# Altium PCB PCB.PcbDoc (part 1 of 2)
Units mm, origin at the board's own origin, x right, y up, seen from the top; angles counter-clockwise.
Board outline 181 x 108 mm, 2 copper layers (Top Layer, Bottom Layer), stack 1.571 mm thick; 37 components, 127 nets, 780 pads, 76 vias.
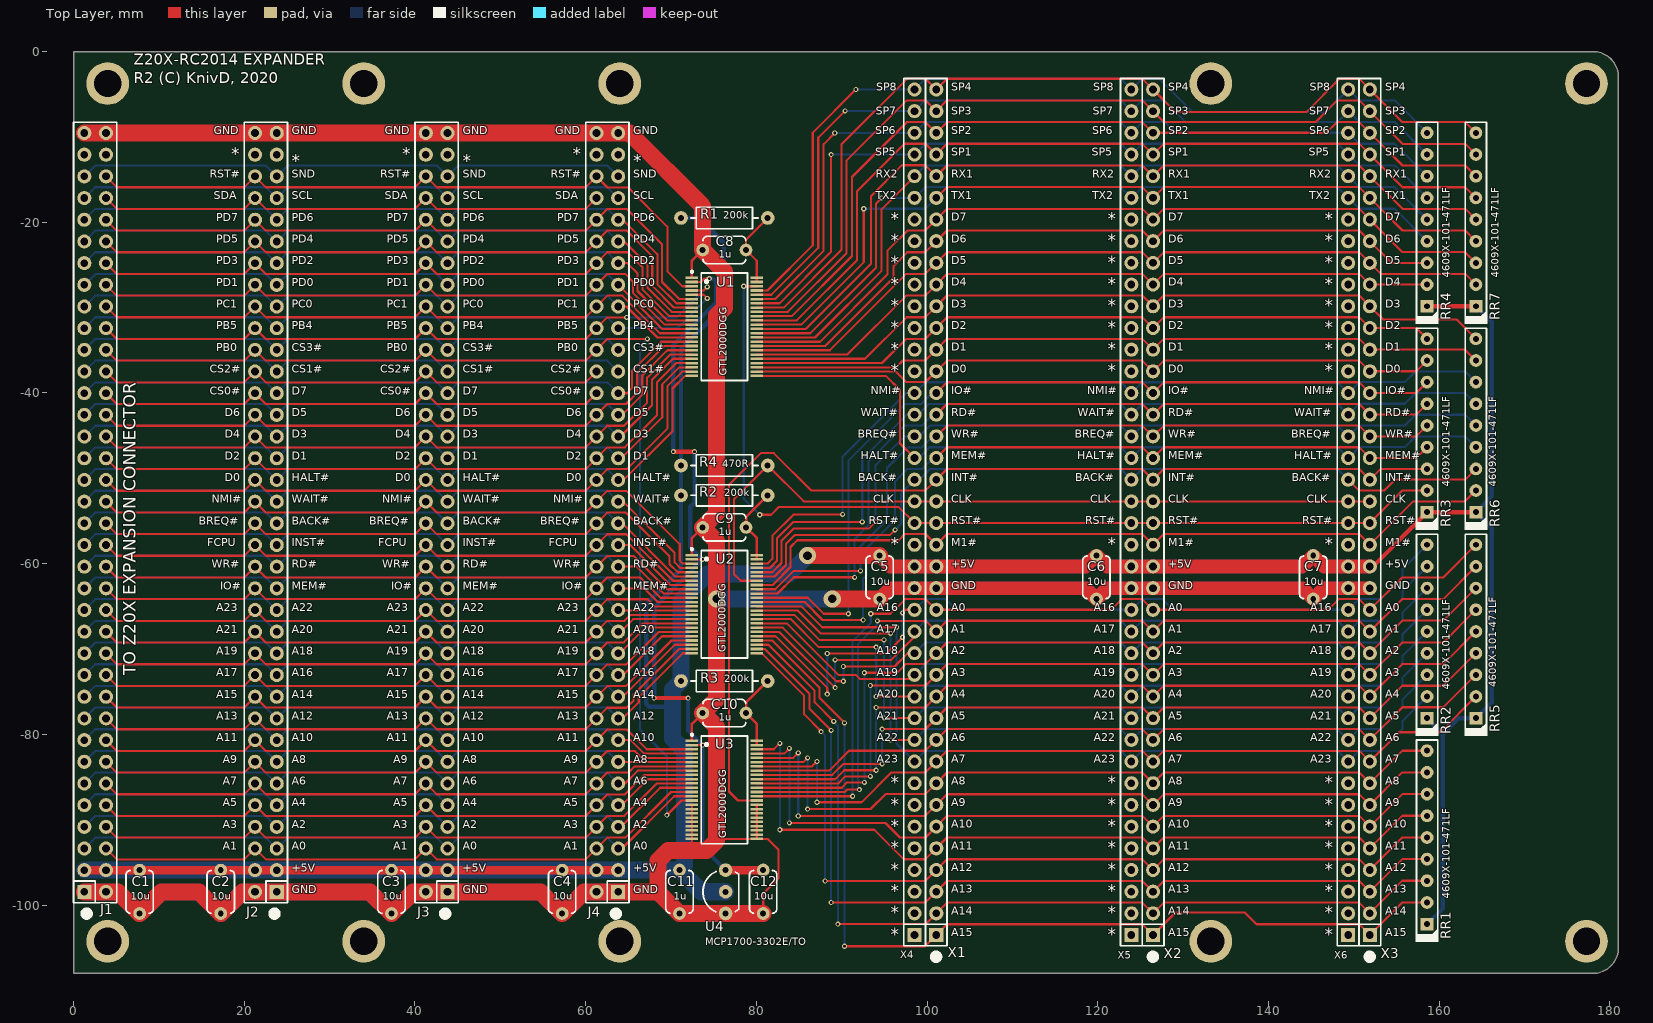
[diagram p0: Top Layer view]
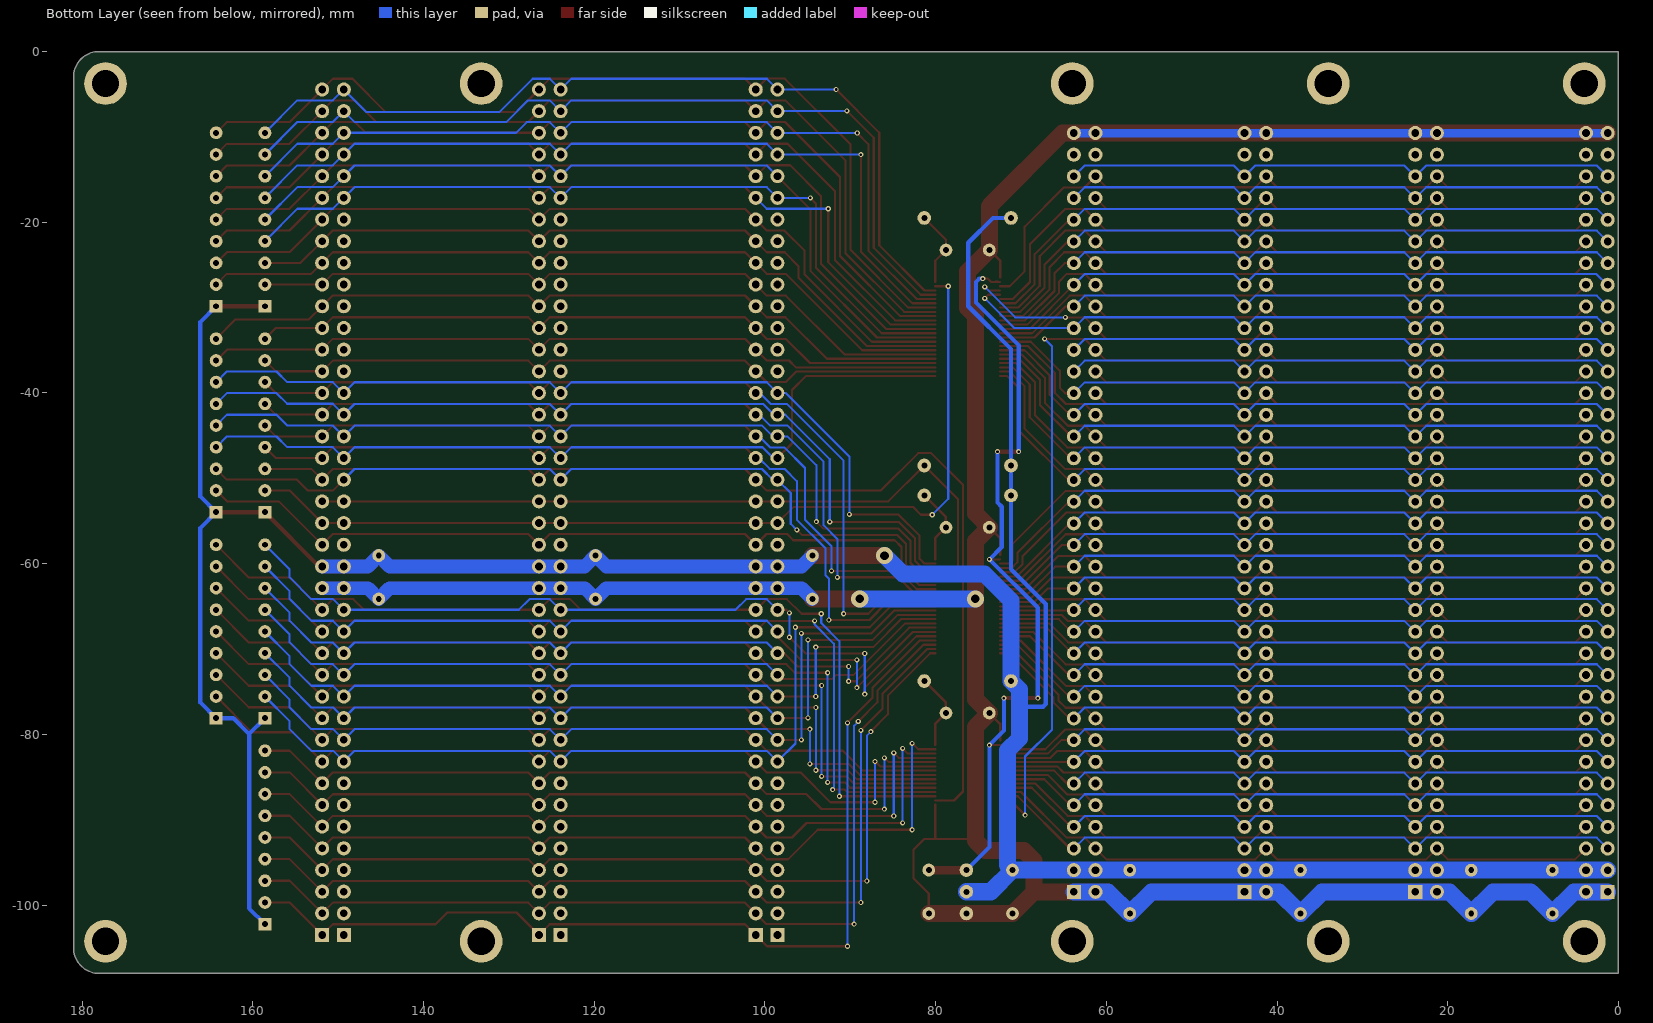
[diagram p1: Bottom Layer view, seen from below]

## Layer stack, top to bottom
Top Solder: solder mask 0.0102, Solder Resist, Dk 3.5
Top Layer: signal copper 0.0356
Dielectric 1: core 1.5, FR-4, Dk 4.2
Bottom Layer: signal copper 0.0356
Solder Side: solder mask 0.0102, Solder Resist, Dk 3.5

## Board outline
0,-108 178,-108 ccw(c178,-105) 181,-105 181,-3 ccw(c178,-3) 178,0 0,0

## Design rules (kind name [scope] priority, off if disabled: settings)
Clearance Clearance_U1 [(InComponent('U1') OR InComponent('U2') OR InComponent('U3'))] p1: gap=0.2 ignorepadtopadclearanceinfootprint=TRUE
Clearance Clearance_Poly [(IsRegion)] p2: gap=0.5 ignorepadtopadclearanceinfootprint=TRUE
Clearance [All] p3: gap=0.25 ignorepadtopadclearanceinfootprint=TRUE
DiffPairsRouting [All] p1: maxlimit=1 minlimit=0.15 mostfreqgap=0.2 toplayer_minwidth=0.2 toplayer_maxwidth=1 toplayer_prefwidth=0.2 bottomlayer_minwidth=0.2 bottomlayer_maxwidth=1 bottomlayer_prefwidth=0.2 maxuncoupledlength=12.7
HoleSize [All] p1 off: absolutevalues=TRUE maxlimit=2.5 minlimit=0.025 maxpercent=80.000 minpercent=20.000
HoleToHoleClearance [All] p1 off: gap=0 allowstackedmicrovias=TRUE
LayerPairs [All] p1 off: enforce=TRUE
MaxMinImpedance [InNet('ANT50R')] p1: minimum=49.90 maximum=50.10
MinimumSolderMaskSliver [All] p1 off: minsoldermaskwidth=-50
NetAntennae [All] p1 off: netantennaetolerance=0
PlaneClearance [All] p1: clearance=0.5
PlaneConnect [All] p1: planeconnectstyle=Direct reliefexpansion=0.5 reliefentries=4 reliefconductorwidth=0.35 reliefairgap=0.35
PolygonConnect [All] p1: thpad.connectstyle=Relief thpad.reliefconductorwidth=0.25 thpad.reliefentries=4 thpad.polygonreliefangle="90 Angle" thpad.airgapwidth=0.35 smdpad.connectstyle=Relief smdpad.reliefconductorwidth=0.25 smdpad.reliefentries=4 smdpad.polygonreliefangle="90 Angle" smdpad.airgapwidth=0.35 via.connectstyle=Direct via.reliefconductorwidth=0.35 via.reliefentries=4 via.polygonreliefangle="90 Angle" via.airgapwidth=0.35
RoutingCorners [All] p1: cornerstyle=45-Degree minsetback=2 maxsetback=2
RoutingVias [All] p1: holewidth=0.3 width=0.6 viastyle="Through Hole" minholewidth=0.3 minwidth=0.6 maxholewidth=1 maxwidth=2
SilkToBoardRegionClearance [All] p1 off:
SilkToSilkClearance [All] p1 off: silktosilkclearance=-50
SilkToSolderMaskClearance [IsPad] p1 off: minsilkscreentomaskgap=-50 clearancetoexposedcopper=TRUE
SolderMaskExpansion [All] p1: expansion=0.102
Width [All] p1: maxlimit=5 minlimit=0.2 preferedwidth=0.25
18 further rules are at their usual default settings.

## Components (designator, comment, footprint, x,y, rotation, side; value= is the part's Value field where it differs from the comment)
C1 "10u" CAPRR508-350X500X500 7.75,-98.45 r270 top locked
C2 "10u" CAPRR508-350X500X500 17.25,-98.45 r270 top locked
C3 "10u" CAPRR508-350X500X500 37.25,-98.45 r270 top locked
C4 "10u" CAPRR508-350X500X500 57.25,-98.45 r270 top locked
C5 "10u" CAPRR508-350X500X500 94.44,-61.595 r90 top locked
C6 "10u" CAPRR508-350X500X500 119.84,-61.595 r90 top locked
C7 "10u" CAPRR508-350X500X500 145.24,-61.595 r90 top locked
C8 "1u" CAPRR508-350X500X500 76.25,-23.25 r180 top locked
C9 "1u" CAPRR508-350X500X500 76.25,-55.75 r180 top locked
C10 "1u" CAPRR508-350X500X500 76.25,-77.5 r180 top locked
C11 "1u" CAPRR508-350X500X500 71,-98.44 r270 top locked
C12 "10u" CAPRR508-350X500X500 80.8,-98.44 r270 top locked
J1 "" 2011-2X36S-F#1 2.54,-54 r90 top locked
J2 "" 2011-2X36S-F#2 22.54,-54 r90 top locked
J3 "" 2011-2X36S-F#2 42.54,-54 r90 top locked
J4 "" 2011-2X36S-F#2 62.54,-54 r90 top locked
R1 "200k" RES1016-660X250 76.25,-19.5 r0 top locked
R2 "200k" RES1016-660X250 76.25,-52 r0 top locked
R3 "200k" RES1016-660X250 76.25,-73.75 r0 top locked
R4 "470R" RES1016-660X250 76.25,-48.5 r180 top locked
RR1 "4609X-101-471LF" RN_BOURNS_4600X 158.575,-92.075 r90 top locked
RR2 "4609X-101-471LF" RN_BOURNS_4600X 158.575,-67.945 r90 top locked
RR3 "4609X-101-471LF" RN_BOURNS_4600X 158.575,-43.815 r90 top locked
RR4 "4609X-101-471LF" RN_BOURNS_4600X 158.575,-19.685 r90 top locked
RR5 "4609X-101-471LF" RN_BOURNS_4600X 164.29,-67.945 r90 top locked
RR6 "4609X-101-471LF" RN_BOURNS_4600X 164.29,-43.815 r90 top locked
RR7 "4609X-101-471LF" RN_BOURNS_4600X 164.29,-19.685 r90 top locked
U1 "GTL2000DGG" SOP50P810X120-48N 76.25,-32.25 r0 top locked
U2 "GTL2000DGG" SOP50P810X120-48N 76.25,-64.75 r0 top locked
U3 "GTL2000DGG" SOP50P810X120-48N 76.25,-86.5 r0 top locked
U4 "MCP1700-3302E/TO" TO-92AA-P254 76.4,-98.44 r90 top locked
X1 "SIL40-F" 2011-1X40S 101.075,-53.975 r90 top locked
X2 "SIL40-F" 2011-1X40S 126.475,-53.975 r90 top locked
X3 "SIL40-F" 2011-1X40S 151.875,-53.975 r90 top locked
X4 "SIL40-F" 2011-1X40S 98.535,-53.975 r90 top locked
X5 "SIL40-F" 2011-1X40S 123.935,-53.975 r90 top locked
X6 "SIL40-F" 2011-1X40S 149.335,-53.975 r90 top locked

## Footprints (in the part's own frame and the unit in brackets; to place one, negate y for a bottom-side part, rotate by r counter-clockwise, add the part's x,y. Pads: shape width x height; smd on the part's side, far side on the other; paste and mask are expansions set on the pad)
2011-1X40S [mil] "2011-1X40 Straight Pin Header"
  rect 65x65 hole 35.43: 1(-1950,0)
  round 65 hole 35.43: 2(-1850,0) 3(-1750,0) 4(-1650,0) 5(-1550,0) 6(-1450,0) 7(-1350,0) 8(-1250,0) 9(-1150,0) 10(-1050,0) 11(-950,0) 12(-850,0) 13(-750,0) 14(-650,0) 15(-550,0) 16(-450,0) 17(-350,0) 18(-250,0) 19(-150,0) 20(-50,0) 21(50,0) 22(150,0) 23(250,0) 24(350,0) 25(450,0) 26(550,0) 27(650,0) 28(750,0) 29(850,0) 30(950,0) 31(1050,0) 32(1150,0) 33(1250,0) 34(1350,0) 35(1450,0) 36(1550,0) 37(1650,0) 38(1750,0) 39(1850,0) 40(1950,0)
  silkscreen extent -2000,-50 2000,50
2011-2X36S-F#1 [mil] "2011-2X36 Straight Pin Header"
  rect 65x65 hole 35.43: 1(-1750,50)
  round 65 hole 35.43: 2(-1750,-50) 3(-1650,50) 4(-1650,-50) 5(-1550,50) 6(-1550,-50) 7(-1450,50) 8(-1450,-50) 9(-1350,50) 10(-1350,-50) 11(-1250,50) 12(-1250,-50) 13(-1150,50) 14(-1150,-50) 15(-1050,50) 16(-1050,-50) 17(-950,50) 18(-950,-50) 19(-850,50) 20(-850,-50) 21(-750,50) 22(-750,-50) 23(-650,50) 24(-650,-50) 25(-550,50) 26(-550,-50) 27(-450,50) 28(-450,-50) 29(-350,50) 30(-350,-50) 31(-250,50) 32(-250,-50) 33(-150,50) 34(-150,-50) 35(-50,50) 36(-50,-50) 37(50,50) 38(50,-50) 39(150,50) 40(150,-50) 41(250,50) 42(250,-50) 43(350,50) 44(350,-50) 45(450,50) 46(450,-50) 47(550,50) 48(550,-50) 49(650,50) 50(650,-50) 51(750,50) 52(750,-50) 53(850,50) 54(850,-50) 55(950,50) 56(950,-50) 57(1050,50) 58(1050,-50) 59(1150,50) 60(1150,-50) 61(1250,50) 62(1250,-50) 63(1350,50) 64(1350,-50) 65(1450,50) 66(1450,-50) 67(1550,50) 68(1550,-50) 69(1650,50) 70(1650,-50) 71(1750,50) 72(1750,-50)
  silkscreen extent -1800,-100 1800,100, body extent -1810,-98 1810,98, height 118
2011-2X36S-F#2 [mil] "2011-2X36 Straight Pin Header"
  rect 65x65 hole 35.43: 1(-1750,-50)
  round 65 hole 35.43: 2(-1750,50) 3(-1650,-50) 4(-1650,50) 5(-1550,-50) 6(-1550,50) 7(-1450,-50) 8(-1450,50) 9(-1350,-50) 10(-1350,50) 11(-1250,-50) 12(-1250,50) 13(-1150,-50) 14(-1150,50) 15(-1050,-50) 16(-1050,50) 17(-950,-50) 18(-950,50) 19(-850,-50) 20(-850,50) 21(-750,-50) 22(-750,50) 23(-650,-50) 24(-650,50) 25(-550,-50) 26(-550,50) 27(-450,-50) 28(-450,50) 29(-350,-50) 30(-350,50) 31(-250,-50) 32(-250,50) 33(-150,-50) 34(-150,50) 35(-50,-50) 36(-50,50) 37(50,-50) 38(50,50) 39(150,-50) 40(150,50) 41(250,-50) 42(250,50) 43(350,-50) 44(350,50) 45(450,-50) 46(450,50) 47(550,-50) 48(550,50) 49(650,-50) 50(650,50) 51(750,-50) 52(750,50) 53(850,-50) 54(850,50) 55(950,-50) 56(950,50) 57(1050,-50) 58(1050,50) 59(1150,-50) 60(1150,50) 61(1250,-50) 62(1250,50) 63(1350,-50) 64(1350,50) 65(1450,-50) 66(1450,50) 67(1550,-50) 68(1550,50) 69(1650,-50) 70(1650,50) 71(1750,-50) 72(1750,50)
  silkscreen extent -1800,-100 1800,100, body extent -1810,-98 1810,98, height 335
CAPRR508-350X500X500 [mm] "Capacitor Radial Rounded, Pin spacing 5.08mm - Body With 3.2mm X Body Length 5.0mm X Body Height 5.0mm"
  round 1.5 hole 0.7: 1(-2.54,0) 2(2.54,0)
  silkscreen extent -2.5,-1.6 2.5,1.6, body extent -2.79,-1.75 2.79,1.75, height 5
RES1016-660X250 [mm] "Resistor, Axial, Pad spacing 10.16 mm - Body Lengh 6.6mm X Body Diameter 2.5mm"
  round 1.6 hole 0.7: 1(-5.08,0) 2(5.08,0)
  silkscreen extent -3.95,-1.25 3.95,1.25, body extent -5.38,-1.25 5.38,1.25, height 2.5
RN_BOURNS_4600X [mm] "SIP-9 Resistor Network, Body 22.81x 2.49mm, Bourns Serie 4600X"
  rect 1.5x1.5 hole 0.7: 1(-10.16,0)
  round 1.5 hole 0.7: 2(-7.62,0) 3(-5.08,0) 4(-2.54,0) 5(0,0) 6(2.54,0) 7(5.08,0) 8(7.62,0) 9(10.16,0)
  silkscreen extent -12.22,-1.35 11.41,1.35, body extent -11.4,-1.24 11.41,1.25, height 5.08
SOP50P810X120-48N [mm] "SOP, 48-Leads, Body 12.6x6.2mm (max), Pitch 0.50mm, IPC Medium Density"
  rect 1.45x0.3 smd: 1(-3.8,5.75) 2(-3.8,5.25) 3(-3.8,4.75) 4(-3.8,4.25) 5(-3.8,3.75) 6(-3.8,3.25) 7(-3.8,2.75) 8(-3.8,2.25) 9(-3.8,1.75) 10(-3.8,1.25) 11(-3.8,0.75) 12(-3.8,0.25) 13(-3.8,-0.25) 14(-3.8,-0.75) 15(-3.8,-1.25) 16(-3.8,-1.75) 17(-3.8,-2.25) 18(-3.8,-2.75) 19(-3.8,-3.25) 20(-3.8,-3.75) 21(-3.8,-4.25) 22(-3.8,-4.75) 23(-3.8,-5.25) 24(-3.8,-5.75) 25(3.8,-5.75) 26(3.8,-5.25) 27(3.8,-4.75) 28(3.8,-4.25) 29(3.8,-3.75) 30(3.8,-3.25) 31(3.8,-2.75) 32(3.8,-2.25) 33(3.8,-1.75) 34(3.8,-1.25) 35(3.8,-0.75) 36(3.8,-0.25) 37(3.8,0.25) 38(3.8,0.75) 39(3.8,1.25) 40(3.8,1.75) 41(3.8,2.25) 42(3.8,2.75) 43(3.8,3.25) 44(3.8,3.75) 45(3.8,4.25) 46(3.8,4.75) 47(3.8,5.25) 48(3.8,5.75)
  silkscreen extent -3.92,-6.3 2.7,6.57, body extent -4.06,-6.3 4.06,6.3, height 1.2
TO-92AA-P254 [mm] "TO-92 (TO226), Pitch 2.54mm, Flat Index, 3 In-Line, Bent Leads, Body Dia. 5.3mm"
  round 1.6 hole 0.7: 1(-2.54,0) 2(0,0) 3(2.54,0)
  silkscreen extent -2.36,-1.53 2.37,2.66, body extent -2.81,-1.53 2.81,2.64, height 9.33

## Part data
C1 C2 C3 C4 C5 C6 C7 C8 C9 C10 C11 C12: library part Capacitor, "Capacitor"
J1 J2 J3 J4: library part "Connector 2x36", "Dual row, 72-way connector"
R1 R2 R3 R4: library part Resistor, "Resistor"
RR1 RR2 RR3 RR4 RR5 RR6 RR7: library part "Resistor Array x8 (BUSSED)", "Resistor Array (Bussed)"
U1 U2 U3: library part GTL2000, "22-bit bi-directional low voltage translator", Manufacturer=NXP
U4: library part 78Lxx, "3-terminal 250mA positive voltage regulator", Manufacturer=Microchip
X1 X2 X3 X4 X5 X6: library part "Connector 1x40", "Single row, 40-way connector"

## Free pads (board coordinates)
  round 5 hole 3.2: 0(4,-104.25) 0(4,-3.75) 0(34,-104.25) 0(34,-3.75) 0(64,-104.25) 0(64,-3.75) 0(133.25,-104.25) 0(133.25,-3.75) 0(177.25,-104.25) 0(177.25,-3.75)

## Via types
v1: diameter 0.6, hole 0.3, Top Layer to Bottom Layer, tented both sides, 73 vias
v2: diameter 2, hole 1, Top Layer to Bottom Layer, tented both sides, 3 vias

## Nets (pads, with @x,y where several pads share a name; then routed paths per layer and width w, separated by ;. In a path a pad name is that pad's centre, name@x,y a point inside that pad or via, vN(x,y) a via of type N, cw(c..) or ccw(c..) an arc to the next point about the centre after c; other vN are vias at no path point)
*A0: RR5.9 U3.35 X1.16 X2.16 X3.16 | length 110.8
  Top Layer w0.25: U3.35@80.05,-87.25 v1(91.275,-87.25) ; v1(93.4,-65.875) 95.7,-65.875 97.425,-64.15 99.82,-64.15 X1.16@101.075,-65.405 121.57,-65.405 122.825,-64.15 125.22,-64.15 X2.16@126.475,-65.405 146.97,-65.405 148.225,-64.15 150.62,-64.15 X3.16@151.875,-65.405 155.655,-61.625 160.45,-61.625 RR5.9@164.29,-57.785
  Bottom Layer w0.25: v1(91.275,-87.25) 91.275,-69.075 93.4,-66.95 v1(93.4,-65.875)
*A1: RR5.8 U3.36 X1.15 X2.15 X3.15 | length 108.8
  Top Layer w0.25: U3.36@80.05,-86.75 90.35,-86.75 90.625,-86.475 v1(92.075,-86.475) ; v1(94.175,-66.7) 99.83,-66.7 X1.15@101.075,-67.945 102.33,-66.69 125.22,-66.69 X2.15@126.475,-67.945 127.73,-66.69 150.62,-66.69 X3.15@151.875,-67.945 155.67,-64.15 160.465,-64.15 RR5.8@164.29,-60.325
  Bottom Layer w0.25: v1(92.075,-86.475) 91.925,-86.325 91.925,-69.375 94.175,-67.125 v1(94.175,-66.7)
*A2: RR5.7 U3.37 X1.14 X2.14 X3.14 | length 103.5
  Top Layer w0.25: U3.37@80.05,-86.25 90,-86.25 90.625,-85.625 v1(92.65,-85.625) ; v1(92.65,-72.775) 96.5,-72.775 97.5,-71.775 99.785,-71.775 X1.14@101.075,-70.485 102.33,-69.23 125.22,-69.23 X2.14@126.475,-70.485 127.73,-69.23 150.62,-69.23 X3.14@151.875,-70.485 155.685,-66.675 160.48,-66.675 RR5.7@164.29,-62.865
  Bottom Layer w0.25: v1(92.65,-85.625) v1(92.65,-72.775)
*A3: RR5.6 U3.38 X1.13 X2.13 X3.13 | length 101
  Top Layer w0.25: U3.38@80.05,-85.75 89.6,-85.75 90.425,-84.925 v1(93.35,-84.925) ; v1(93.35,-74.275) 99.825,-74.275 X1.13@101.075,-73.025 102.33,-71.77 125.22,-71.77 X2.13@126.475,-73.025 127.73,-71.77 150.62,-71.77 X3.13@151.875,-73.025 155.65,-69.25 160.445,-69.25 RR5.6@164.29,-65.405
  Bottom Layer w0.25: v1(93.35,-84.925) v1(93.35,-74.275)
*A4: RR5.5 U3.39 X1.12 X2.12 X3.12 | length 97.8
  Top Layer w0.25: U3.39@80.05,-85.25 89.225,-85.25 90.275,-84.2 v1(94.025,-84.2) ; v1(94.025,-76.85) 99.79,-76.85 X1.12@101.075,-75.565 102.33,-74.31 125.22,-74.31 X2.12@126.475,-75.565 127.73,-74.31 150.62,-74.31 X3.12@151.875,-75.565 155.665,-71.775 160.46,-71.775 RR5.5@164.29,-67.945
  Bottom Layer w0.25: v1(94.025,-84.2) v1(94.025,-76.85)
*A5: RR5.4 U3.40 X1.11 X2.11 X3.11 | length 94.6
  Top Layer w0.25: U3.40@80.05,-84.75 88.9,-84.75 90.2,-83.45 v1(94.725,-83.45) ; v1(94.725,-79.375) 99.805,-79.375 X1.11@101.075,-78.105 102.33,-76.85 125.22,-76.85 X2.11@126.475,-78.105 127.73,-76.85 150.62,-76.85 X3.11@151.875,-78.105 155.68,-74.3 160.475,-74.3 RR5.4@164.29,-70.485
  Bottom Layer w0.25: v1(94.725,-83.45) v1(94.725,-79.375)
*A6: RR5.3 U3.41 X1.10 X2.10 X3.10 | length 91
  Top Layer w0.25: U3.41@80.05,-84.25 88.525,-84.25 90.85,-81.925 99.795,-81.925 X1.10@101.075,-80.645 102.33,-79.39 125.22,-79.39 X2.10@126.475,-80.645 127.73,-79.39 150.62,-79.39 X3.10@151.875,-80.645 155.695,-76.825 160.49,-76.825 RR5.3@164.29,-73.025
*A7: RR5.2 U3.42 X1.9 X2.9 X3.9 | length 96.5
  Top Layer w0.25: U3.42@80.05,-83.75 86.525,-83.75 v1(87.1,-83.175) ; v1(87.1,-87.95) 92.325,-87.95 95.8,-84.475 99.785,-84.475 X1.9@101.075,-83.185 102.33,-81.93 125.22,-81.93 X2.9@126.475,-83.185 127.73,-81.93 150.62,-81.93 X3.9@151.875,-83.185 155.31,-79.75 160.105,-79.75 RR5.2@164.29,-75.565
  Bottom Layer w0.25: v1(87.1,-87.95) v1(87.1,-83.175)
*A8: RR1.9 U3.43 X1.8 X2.8 X3.8 | length 89.6
  Top Layer w0.25: U3.43@80.05,-83.25 85.5,-83.25 v1(86,-82.75) ; v1(86,-88.75) 93.375,-88.75 95.125,-87 99.8,-87 X1.8@101.075,-85.725 102.33,-84.47 125.22,-84.47 X2.8@126.475,-85.725 127.73,-84.47 150.62,-84.47 X3.8@151.875,-85.725 155.685,-81.915 RR1.9@158.575,-81.915
  Bottom Layer w0.25: v1(86,-88.75) v1(86,-82.75)
*A9: RR1.8 U3.44 X1.7 X2.7 X3.7 | length 90.3
  Top Layer w0.25: U3.44@80.05,-82.75 84.325,-82.75 v1(84.9,-82.175) ; v1(84.913,-89.563) 84.925,-89.55 99.79,-89.55 X1.7@101.075,-88.265 102.33,-87.01 125.22,-87.01 X2.7@126.475,-88.265 127.73,-87.01 150.62,-87.01 X3.7@151.875,-88.265 155.685,-84.455 RR1.8@158.575,-84.455
  Bottom Layer w0.25: v1(84.9,-82.175) 84.913,-82.187 v1(84.913,-89.563)
*A10: RR1.7 U3.45 X1.6 X2.6 X3.6 | length 92.4
  Top Layer w0.25: U3.45@80.05,-82.25 83.275,-82.25 v1(83.875,-81.65) ; v1(83.875,-90.375) 95.125,-90.375 96.825,-92.075 99.805,-92.075 X1.6@101.075,-90.805 102.33,-89.55 125.22,-89.55 X2.6@126.475,-90.805 127.73,-89.55 150.62,-89.55 X3.6@151.875,-90.805 155.685,-86.995 RR1.7@158.575,-86.995
  Bottom Layer w0.25: v1(83.875,-90.375) v1(83.875,-81.65)
*A11: RR1.6 U3.46 X1.5 X2.5 X3.5 | length 94.6
  Top Layer w0.25: U3.46@80.05,-81.75 82.05,-81.75 v1(82.75,-81.05) ; v1(82.75,-91.175) 93.825,-91.175 97.275,-94.625 99.795,-94.625 X1.5@101.075,-93.345 102.33,-92.09 125.22,-92.09 X2.5@126.475,-93.345 127.73,-92.09 150.62,-92.09 X3.5@151.875,-93.345 155.685,-89.535 RR1.6@158.575,-89.535
  Bottom Layer w0.25: v1(82.75,-91.175) v1(82.75,-81.05)
*A12: RR1.5 U2.25 X1.4 X2.4 X3.4 | length 105
  Top Layer w0.25: U2.25@80.05,-70.5 80.625,-70.5 85.6,-75.475 85.6,-77.65 87.575,-79.625 v1(87.575,-79.675) ; v1(88.05,-97.175) 99.785,-97.175 X1.4@101.075,-95.885 102.33,-94.63 125.22,-94.63 X2.4@126.475,-95.885 127.73,-94.63 150.62,-94.63 X3.4@151.875,-95.885 155.685,-92.075 RR1.5@158.575,-92.075
  Bottom Layer w0.25: v1(87.575,-79.675) 88.05,-80.15 v1(88.05,-97.175)
*A13: RR1.4 U2.26 X1.3 X2.3 X3.3 | length 107.9
  Top Layer w0.25: U2.26@80.05,-70 80.975,-70 86.225,-75.25 86.225,-77 v1(88.75,-79.525) ; v1(88.75,-99.7) 99.8,-99.7 X1.3@101.075,-98.425 102.33,-97.17 125.22,-97.17 X2.3@126.475,-98.425 127.73,-97.17 150.62,-97.17 X3.3@151.875,-98.425 155.685,-94.615 RR1.4@158.575,-94.615
  Bottom Layer w0.25: v1(88.75,-99.7) v1(88.75,-79.525)
*A14: RR1.3 U2.27 X1.2 X2.2 X3.2 | length 110.7
  Top Layer w0.25: U2.27@80.05,-69.5 81.425,-69.5 86.825,-74.9 86.825,-76.25 v1(89.063,-78.488) ; v1(89.55,-102.225) 99.815,-102.225 X1.2@101.075,-100.965 102.33,-99.71 125.22,-99.71 X2.2@126.475,-100.965 127.73,-99.71 150.62,-99.71 X3.2@151.875,-100.965 155.685,-97.155 RR1.3@158.575,-97.155
  Bottom Layer w0.25: v1(89.063,-78.488) 89.55,-78.975 v1(89.55,-102.225)
*A15: RR1.2 U2.28 X1.1 X2.1 X3.1 | length 114.7
  Top Layer w0.25: U2.28@80.05,-69 81.85,-69 87.4,-74.55 87.4,-75.725 v1(90.325,-78.65) ; v1(90.325,-104.825) 99.755,-104.825 X1.1@101.075,-103.505 102.33,-102.25 125.22,-102.25 X2.1@126.475,-103.505 129.105,-100.875 137.225,-100.875 138.6,-102.25 150.62,-102.25 X3.1@151.875,-103.505 155.685,-99.695 RR1.2@158.575,-99.695
  Bottom Layer w0.25: v1(90.325,-104.825) v1(90.325,-78.65)
*A16: RR2.9 U2.29 X4.16 X5.16 X6.16 | length 96.5
  Top Layer w0.25: U2.29@80.05,-68.5 82.25,-68.5 88.3,-74.55 v1(88.3,-75.275) ; v1(88.3,-70.525) 95.225,-70.525 v1(97.125,-68.625) ; v1(97.125,-65.775) 97.495,-65.405 X4.16@98.535,-65.405
  Bottom Layer w0.25: v1(88.3,-75.275) v1(88.3,-70.525) ; v1(97.125,-68.625) v1(97.125,-65.775) ; X4.16@98.535,-65.405 99.79,-64.15 102.185,-64.15 103.44,-65.405 X5.16@123.935,-65.405 125.19,-64.15 127.585,-64.15 128.84,-65.405 X6.16@149.335,-65.405 ; X6.16@149.04,-65.7 X6.16@149.335,-65.405 ; RR2.9@158.575,-57.785 155.675,-60.685 155.675,-61.605 153.13,-64.15 150.59,-64.15 X6.16@149.335,-65.405
*A17: RR2.8 U2.30 X4.15 X5.15 X6.15 | length 92
  Top Layer w0.25: U2.30@80.05,-68 82.7,-68 v1(89.225,-74.525) ; v1(89.225,-71.275) 95.8,-71.275 98.535,-68.54 X4.15@98.535,-67.945
  Bottom Layer w0.25: v1(89.225,-74.525) v1(89.225,-71.275) ; X4.15@98.535,-67.945 99.79,-66.69 122.68,-66.69 X5.15@123.935,-67.945 125.19,-66.69 148.08,-66.69 X6.15@149.335,-67.945 ; X6.15@149.365,-67.945 150.62,-66.69 153.13,-66.69 155.675,-64.145 155.675,-63.225 RR2.8@158.575,-60.325
*A18: RR2.7 U2.31 X4.14 X5.14 X6.14 | length 89.2
  Top Layer w0.25: U2.31@80.05,-67.5 83.1,-67.5 89.375,-73.775 v1(90.2,-73.775) ; v1(90.2,-72.05) 96.175,-72.05 97.74,-70.485 X4.14@98.535,-70.485
  Bottom Layer w0.25: v1(90.2,-73.775) v1(90.2,-72.05) ; X4.14@98.535,-70.485 99.79,-69.23 122.68,-69.23 X5.14@123.935,-70.485 125.19,-69.23 148.08,-69.23 X6.14@149.335,-70.485 ; X6.14@149.365,-70.485 150.62,-69.23 153.13,-69.23 155.675,-66.685 155.675,-65.765 RR2.7@158.575,-62.865
*A19: RR2.6 U2.32 X4.13 X5.13 X6.13 | length 87.2
  Top Layer w0.25: U2.32@80.05,-67 83.575,-67 89.6,-73.025 91.65,-73.025 92.125,-73.5 98.06,-73.5 X4.13@98.535,-73.025
  Bottom Layer w0.25: X4.13@98.535,-73.025 99.79,-71.77 122.68,-71.77 X5.13@123.935,-73.025 125.19,-71.77 148.08,-71.77 X6.13@149.335,-73.025 149.365,-73.025 150.62,-71.77 153.13,-71.77 155.675,-69.225 155.675,-68.305 RR2.6@158.575,-65.405
*A20: RR2.5 U2.33 X4.12 X5.12 X6.12 | length 91.4
  Top Layer w0.25: U2.33@80.05,-66.5 84.05,-66.5 87.325,-69.775 v1(94.05,-69.775) ; v1(94.05,-75.565) X4.12@98.535,-75.565
  Bottom Layer w0.25: v1(94.05,-75.565) v1(94.05,-69.775) ; X4.12@98.535,-75.565 99.79,-74.31 122.68,-74.31 X5.12@123.935,-75.565 125.19,-74.31 148.08,-74.31 X6.12@149.335,-75.565 149.365,-75.565 150.62,-74.31 153.13,-74.31 155.675,-71.765 155.675,-70.845 RR2.5@158.575,-67.945
*A21: RR2.4 U2.34 X4.11 X5.11 X6.11 | length 94.7
  Top Layer w0.25: U2.34@80.05,-66 84.45,-66 87.375,-68.925 v1(94.95,-68.925) ; v1(94.95,-78.075) 98.505,-78.075 X4.11@98.535,-78.105
  Bottom Layer w0.25: v1(94.95,-78.075) v1(94.95,-68.925) ; X4.11@98.535,-78.105 99.79,-76.85 122.68,-76.85 X5.11@123.935,-78.105 125.19,-76.85 148.08,-76.85 X6.11@149.335,-78.105 150.59,-76.85 153.13,-76.85 155.675,-74.305 155.675,-73.385 RR2.4@158.575,-70.485
*A22: RR2.3 U2.35 X4.10 X5.10 X6.10 | length 97.9
  Top Layer w0.25: U2.35@80.05,-65.5 84.875,-65.5 87.55,-68.175 v1(95.725,-68.175) ; v1(95.72,-80.645) X4.10@98.535,-80.645
  Bottom Layer w0.25: v1(95.72,-80.645) 95.72,-68.18 v1(95.725,-68.175) ; X4.10@98.535,-80.645 99.79,-79.39 122.68,-79.39 X5.10@123.935,-80.645 125.19,-79.39 148.08,-79.39 X6.10@149.335,-80.645 150.59,-79.39 153.13,-79.39 155.675,-76.845 155.675,-75.925 RR2.3@158.575,-73.025
*A23: RR2.2 U2.36 X4.9 X5.9 X6.9 | length 99.8
  Top Layer w0.25: U2.36@80.05,-65 85.25,-65 87.7,-67.45 v1(96.425,-67.45)
  Bottom Layer w0.25: v1(96.425,-67.45) 96.425,-81.075 X4.9@98.535,-83.185 99.79,-81.93 122.68,-81.93 X5.9@123.935,-83.185 125.19,-81.93 148.08,-81.93 X6.9@149.335,-83.185 150.59,-81.93 153.13,-81.93 155.675,-79.385 155.675,-78.465 RR2.2@158.575,-75.565
*BACK#: RR6.3 U2.43 X4.22 X5.22 X6.22 | length 96.2
  Top Layer w0.25: U2.43@80.05,-61.5 82.125,-61.5 83.475,-60.15 83.475,-57.675 84.525,-56.625 95.675,-56.625 v1(96.25,-56.05) ; X6.22@149.335,-50.165 150.62,-51.45 153.525,-51.45 154.825,-50.15 163.035,-50.15 RR6.3@164.29,-48.895
  Bottom Layer w0.25: v1(96.25,-56.05) 96.975,-55.325 96.975,-51.725 X4.22@98.535,-50.165 99.085,-50.165 100.34,-48.91 122.68,-48.91 X5.22@123.935,-50.165 125.19,-48.91 148.08,-48.91 X6.22@149.335,-50.165
*BREQ#: RR6.5 U2.44 X4.24 X5.24 X6.24 | length 99.9
  Top Layer w0.25: U2.44@80.05,-61 81.875,-61 82.95,-59.925 82.95,-57.3 84.35,-55.9 93.15,-55.9 v1(93.975,-55.075)
  Bottom Layer w0.25: v1(93.975,-55.075) 93.975,-48.475 97.365,-45.085 X4.24@98.535,-45.085 99.065,-45.085 100.32,-43.83 122.68,-43.83 X5.24@123.935,-45.085 125.19,-43.83 148.08,-43.83 X6.24@149.335,-45.085 150.61,-43.81 155.975,-43.81 157.225,-42.56 163.035,-42.56 RR6.5@164.29,-43.815
*D0: RR3.8 U1.26 X1.27 X2.27 X3.27 | length 82.2
  Top Layer w0.25: U1.26@80.05,-37.5 96.35,-37.5 97.575,-38.725 99.815,-38.725 X1.27@101.075,-37.465 102.33,-36.21 125.22,-36.21 X2.27@126.475,-37.465 127.73,-36.21 150.62,-36.21 X3.27@151.875,-37.465 157.305,-37.465 RR3.8@158.575,-36.195
*D1: RR6.8 U1.27 X1.28 X2.28 X3.28 | length 87.7
  Top Layer w0.25: U1.27@80.05,-37 96.375,-37 97.175,-36.2 99.8,-36.2 X1.28@101.075,-34.925 102.33,-33.67 125.22,-33.67 X2.28@126.475,-34.925 127.73,-33.67 150.62,-33.67 X3.28@151.875,-34.925 163.02,-34.925 RR6.8@164.29,-36.195
*D2: RR3.9 U1.28 X1.29 X2.29 X3.29 | length 82.8
  Top Layer w0.25: U1.28@80.05,-36.5 94.725,-36.5 97.55,-33.675 99.785,-33.675 X1.29@101.075,-32.385 102.33,-31.13 125.22,-31.13 X2.29@126.475,-32.385 127.73,-31.13 150.62,-31.13 X3.29@151.875,-32.385 157.305,-32.385 RR3.9@158.575,-33.655
*D3: RR6.9 U1.29 X1.30 X2.30 X3.30 | length 90.4
  Top Layer w0.25: U1.29@80.05,-36 92.725,-36 97.6,-31.125 99.795,-31.125 X1.30@101.075,-29.845 102.33,-28.59 125.22,-28.59 X2.30@126.475,-29.845 127.73,-28.59 150.62,-28.59 X3.30@151.875,-29.845 153.43,-31.4 162.035,-31.4 RR6.9@164.29,-33.655
*D4: RR4.2 U1.30 X1.31 X2.31 X3.31 | length 84
  Top Layer w0.25: U1.30@80.05,-35.5 90.65,-35.5 97.55,-28.6 99.78,-28.6 X1.31@101.075,-27.305 102.33,-26.05 125.22,-26.05 X2.31@126.475,-27.305 127.73,-26.05 150.62,-26.05 X3.31@151.875,-27.305 RR4.2@158.575,-27.305
*D5: RR7.2 U1.31 X1.32 X2.32 X3.32 | length 91.6
  Top Layer w0.25: U1.31@80.05,-35 88.6,-35 97.55,-26.05 99.79,-26.05 X1.32@101.075,-24.765 102.33,-23.51 125.22,-23.51 X2.32@126.475,-24.765 127.73,-23.51 150.62,-23.51 X3.32@151.875,-24.765 153.16,-26.05 163.035,-26.05 RR7.2@164.29,-27.305
*D6: RR4.3 U1.32 X1.33 X2.33 X3.33 | length 87.5
  Top Layer w0.25: U1.32@80.05,-34.5 88.05,-34.5 96.075,-26.475 96.075,-25.125 97.675,-23.525 99.775,-23.525 X1.33@101.075,-22.225 102.33,-20.97 125.22,-20.97 X2.33@126.475,-22.225 127.73,-20.97 150.62,-20.97 X3.33@151.875,-22.225 154.415,-24.765 RR4.3@158.575,-24.765
*D7: RR7.3 U1.33 X1.34 X2.34 X3.34 | length 96
  Top Layer w0.25: U1.33@80.05,-34 87.475,-34 95.35,-26.125 95.35,-23.35 97.725,-20.975 99.785,-20.975 X1.34@101.075,-19.685 102.33,-18.43 125.22,-18.43 X2.34@126.475,-19.685 127.73,-18.43 150.62,-18.43 X3.34@151.875,-19.685 155.69,-23.5 163.025,-23.5 RR7.3@164.29,-24.765
*FCPU: R4.1 U2.42 X1.21 X2.21 X3.21 X4.21 X5.21 X6.21 | length 89.6
  Top Layer w0.25: U2.42@80.05,-62 78.15,-62 77.375,-61.225 77.375,-52.455 R4.1@81.33,-48.5 85.535,-52.705 X4.21@98.535,-52.705 X1.21@101.075,-52.705 X5.21@123.935,-52.705 X2.21@126.475,-52.705 X6.21@149.335,-52.705 X3.21@151.875,-52.705
*HALT#: RR6.4 U1.25 X4.23 X5.23 X6.23 | length 95.5
  Top Layer w0.25: U1.25@80.05,-38 95.175,-38 96.825,-39.65 96.825,-45.915 X4.23@98.535,-47.625
  Bottom Layer w0.25: X4.23@98.535,-47.625 99.025,-47.625 100.28,-46.37 122.68,-46.37 X5.23@123.935,-47.625 125.19,-46.37 148.08,-46.37 X6.23@149.335,-47.625 150.61,-46.35 155.975,-46.35 157.225,-45.1 163.035,-45.1 RR6.4@164.29,-46.355
*INST#: RR6.2 U2.41 X1.19 X2.19 X3.19 | length 93.3
  Top Layer w0.25: U2.41@80.05,-62.5 81.9,-62.5 84,-60.4 84,-58.05 84.8,-57.25 96.675,-57.25 97.4,-56.525 99.815,-56.525 X1.19@101.075,-57.785 102.33,-56.53 125.22,-56.53 X2.19@126.475,-57.785 127.73,-56.53 150.62,-56.53 X3.19@151.875,-57.785 156.96,-52.7 163.025,-52.7 RR6.2@164.29,-51.435
*INT#: RR3.3 U3.34 X1.22 X2.22 X3.22 | length 127.9
  Top Layer w0.25: U3.34@80.05,-87.75 77.85,-87.75 76.8,-86.7 76.8,-50.775 80.525,-47.05 82.05,-47.05 86.45,-51.45 99.79,-51.45 X1.22@101.075,-50.165 102.33,-48.91 125.22,-48.91 X2.22@126.475,-50.165 127.73,-48.91 150.62,-48.91 X3.22@151.875,-50.165 153.145,-48.895 RR3.3@158.575,-48.895
*IO#: RR3.7 U2.38 X1.26 X2.26 X3.26 | length 103.1
  Top Layer w0.25: U2.38@80.05,-64 86.025,-64 87.9,-65.875 v1(90.775,-65.875) ; X1.26@101.075,-40.005 102.33,-38.75 125.22,-38.75 X2.26@126.475,-40.005 127.73,-38.75 150.62,-38.75 X3.26@151.875,-40.005 157.305,-40.005 RR3.7@158.575,-38.735
  Bottom Layer w0.25: v1(90.775,-65.875) 90.775,-47.95 97.45,-41.275 99.35,-41.275 100.62,-40.005 X1.26@101.075,-40.005
*MEM#: RR3.4 U2.37 X1.23 X2.23 X3.23 | length 97.2
  Top Layer w0.25: U2.37@80.05,-64.5 85.65,-64.5 87.75,-66.6 v1(92.5,-66.6) ; X1.23@101.075,-47.625 102.33,-46.37 125.22,-46.37 X2.23@126.475,-47.625 127.73,-46.37 150.62,-46.37 X3.23@151.875,-47.625 157.305,-47.625 RR3.4@158.575,-46.355
  Bottom Layer w0.25: v1(92.5,-66.6) 92.5,-61.775 92.9,-61.375 92.9,-58.2 96.25,-54.85 96.25,-50.35 97.7,-48.9 99.45,-48.9 100.725,-47.625 X1.23@101.075,-47.625
*NMI#: RR6.7 U2.46 X4.26 X5.26 X6.26 | length 101.7
  Top Layer w0.25: U2.46@80.05,-60 81.3,-60 81.875,-59.425 81.875,-56.75 84.4,-54.225 v1(90.1,-54.225)
  Bottom Layer w0.25: v1(90.1,-54.225) 90.1,-47.45 97.545,-40.005 X4.26@98.535,-40.005 99.79,-38.75 122.68,-38.75 X5.26@123.935,-40.005 125.19,-38.75 148.08,-38.75 X6.26@149.335,-40.005 150.61,-38.73 155.975,-38.73 157.225,-37.48 163.035,-37.48 RR6.7@164.29,-38.735
*RD#: RR3.6 U2.39 X1.25 X2.25 X3.25 | length 96.8
  Top Layer w0.25: U2.39@80.05,-63.5 82.475,-63.5 84.375,-61.6 v1(91.5,-61.6) ; X1.25@101.075,-42.545 102.33,-41.29 125.22,-41.29 X2.25@126.475,-42.545 127.73,-41.29 150.62,-41.29 X3.25@151.875,-42.545 157.305,-42.545 RR3.6@158.575,-41.275
  Bottom Layer w0.25: v1(91.5,-61.6) 91.5,-57.125 93.125,-55.5 93.125,-48.075 97.4,-43.8 99.425,-43.8 100.68,-42.545 X1.25@101.075,-42.545
*RST#: RR3.2 U1.46 X1.20 X2.20 X3.20 X4.20 X5.20 X6.20 | length 110
  Top Layer w0.25: v1(78.525,-27.5) U1.46@80.05,-27.5 ; v1(80.4,-54.275) 81.725,-54.275 82.65,-53.35 96.64,-53.35 X4.20@98.535,-55.245 X1.20@101.075,-55.245 X5.20@123.935,-55.245 X2.20@126.475,-55.245 X6.20@149.335,-55.245 X3.20@151.875,-55.245 155.685,-51.435 RR3.2@158.575,-51.435
  Bottom Layer w0.25: v1(78.525,-27.5) 78.525,-52.4 v1(80.4,-54.275)
*RX1: RR7.5 U1.36 X1.36 X2.36 X3.36 | length 101.5
  Top Layer w0.25: U1.36@80.05,-32.5 85.8,-32.5 93.425,-24.875 93.425,-16.95 97.05,-13.325 99.795,-13.325 X1.36@101.075,-14.605 102.33,-13.35 125.22,-13.35 X2.36@126.475,-14.605 127.73,-13.35 150.62,-13.35 X3.36@151.875,-14.605 155.705,-18.435 163.04,-18.435 RR7.5@164.29,-19.685
*RX2: RR4.5 U1.34 X4.36 X5.36 X6.36 | length 94.8
  Top Layer w0.25: U1.34@80.05,-33.5 85.35,-33.5 86.875,-33.5 94.675,-25.7 94.675,-18.465 X4.36@98.535,-14.605
  Bottom Layer w0.25: X4.36@98.535,-14.605 99.79,-13.35 122.68,-13.35 X5.36@123.935,-14.605 125.19,-13.35 148.08,-13.35 X6.36@149.335,-14.605 150.615,-15.885 154.775,-15.885 RR4.5@158.575,-19.685
*SP1: RR7.6 U1.38 X1.37 X2.37 X3.37 | length 102.3
  Top Layer w0.25: U1.38@80.05,-31.5 84.725,-31.5 91.8,-24.425 91.8,-16.35 97.35,-10.8 99.81,-10.8 X1.37@101.075,-12.065 102.33,-10.81 125.22,-10.81 X2.37@126.475,-12.065 127.73,-10.81 150.62,-10.81 X3.37@151.875,-12.065 155.705,-15.895 163.04,-15.895 RR7.6@164.29,-17.145
*SP2: RR7.7 U1.39 X1.38 X2.38 X3.38 | length 103.8
  Top Layer w0.25: U1.39@80.05,-31 84.15,-31 91.2,-23.95 91.2,-14.7 97.65,-8.25 99.8,-8.25 X1.38@101.075,-9.525 102.33,-8.27 125.22,-8.27 X2.38@126.475,-9.525 146.775,-9.525 148.03,-8.27 150.62,-8.27 X3.38@151.875,-9.525 155.705,-13.355 163.04,-13.355 RR7.7@164.29,-14.605
*SP3: RR7.8 U1.40 X1.39 X2.39 X3.39 | length 106.6
  Top Layer w0.25: U1.40@80.05,-30.5 83.675,-30.5 90.575,-23.6 90.575,-12.75 97.6,-5.725 99.815,-5.725 X1.39@101.075,-6.985 102.33,-5.73 125.22,-5.73 X2.39@126.475,-6.985 127.76,-8.27 145.505,-8.27 148.045,-5.73 150.62,-5.73 X3.39@151.875,-6.985 155.705,-10.815 163.04,-10.815 RR7.8@164.29,-12.065
*SP4: RR7.9 U1.41 X1.40 X2.40 X3.40 | length 109.5
  Top Layer w0.25: U1.41@80.05,-30 83.2,-30 89.975,-23.225 89.975,-10.875 97.675,-3.175 99.805,-3.175 X1.40@101.075,-4.445 102.33,-3.19 125.22,-3.19 X2.40@126.475,-4.445 129.13,-7.1 144.4,-7.1 148.31,-3.19 150.62,-3.19 X3.40@151.875,-4.445 155.705,-8.275 163.04,-8.275 RR7.9@164.29,-9.525
*SP5: RR4.6 U1.42 X4.37 X5.37 X6.37 | length 96.6
  Top Layer w0.25: U1.42@80.05,-29.5 82.725,-29.5 88.75,-23.475 v1(88.75,-12.075)
  Bottom Layer w0.25: v1(88.75,-12.075) 88.76,-12.065 X4.37@98.535,-12.065 99.79,-10.81 122.68,-10.81 X5.37@123.935,-12.065 125.19,-10.81 148.08,-10.81 X6.37@149.335,-12.065 150.615,-13.345 154.775,-13.345 RR4.6@158.575,-17.145
*SP6: RR4.7 U1.43 X4.38 X5.38 X6.38 | length 98.1
  Top Layer w0.25: U1.43@80.05,-29 82.225,-29 87.875,-23.35 87.875,-10.85 v1(89.175,-9.55)
  Bottom Layer w0.25: v1(89.175,-9.55) 98.51,-9.55 X4.38@98.535,-9.525 99.79,-8.27 122.68,-8.27 X5.38@123.935,-9.525 125.19,-8.27 127.895,-8.27 129.15,-9.525 X6.38@149.335,-9.525 150.615,-10.805 154.775,-10.805 RR4.7@158.575,-14.605
*SP7: RR4.8 U1.44 X4.39 X5.39 X6.39 | length 100.3
  Top Layer w0.25: U1.44@80.05,-28.5 81.75,-28.5 87.25,-23 87.25,-10.1 v1(90.4,-6.95)
  Bottom Layer w0.25: v1(90.4,-6.95) 98.5,-6.95 X4.39@98.535,-6.985 99.79,-5.73 122.68,-5.73 X5.39@123.935,-6.985 123.965,-6.985 125.225,-5.725 127.755,-5.725 130.3,-8.27 148.05,-8.27 X6.39@149.335,-6.985 150.615,-8.265 154.775,-8.265 RR4.8@158.575,-12.065
*SP8: RR4.9 U1.45 X4.40 X5.40 X6.40 | length 102.4
  Top Layer w0.25: U1.45@80.05,-28 81.3,-28 86.6,-22.7 86.6,-9.5 v1(91.65,-4.45)
  Bottom Layer w0.25: v1(91.65,-4.45) 98.53,-4.45 X4.40@98.535,-4.445 99.79,-3.19 122.68,-3.19 X5.40@123.935,-4.445 125.19,-3.19 127.215,-3.19 131.125,-7.1 146.68,-7.1 X6.40@149.335,-4.445 150.615,-5.725 154.775,-5.725 RR4.9@158.575,-9.525
*TX1: RR7.4 U1.37 X1.35 X2.35 X3.35 | length 98.2
  Top Layer w0.25: U1.37@80.05,-32 85.25,-32 92.575,-24.675 v1(92.575,-18.425) ; X1.35@101.075,-17.145 102.33,-15.89 125.22,-15.89 X2.35@126.475,-17.145 127.73,-15.89 150.62,-15.89 X3.35@151.875,-17.145 155.705,-20.975 163.04,-20.975 RR7.4@164.29,-22.225
  Bottom Layer w0.25: v1(92.575,-18.425) 99.795,-18.425 X1.35@101.075,-17.145
*TX2: RR4.4 U1.35 X4.35 X5.35 X6.35 | length 93.7
  Top Layer w0.25: U1.35@80.05,-33 86.325,-33 94.025,-25.3 94.025,-17.8 v1(94.675,-17.15)
  Bottom Layer w0.25: v1(94.675,-17.15) 94.68,-17.145 X4.35@98.535,-17.145 99.79,-15.89 122.68,-15.89 X5.35@123.935,-17.145 125.19,-15.89 148.08,-15.89 X6.35@149.335,-17.145 150.615,-18.425 154.775,-18.425 RR4.4@158.575,-22.225
*WAIT#: RR6.6 U2.45 X4.25 X5.25 X6.25 | length 101.2
  Top Layer w0.25: U2.45@80.05,-60.5 81.6,-60.5 82.425,-59.675 82.425,-57.025 84.35,-55.1 v1(92.4,-55.1)
  Bottom Layer w0.25: v1(92.4,-55.1) 92.4,-47.75 97.605,-42.545 X4.25@98.535,-42.545 98.93,-42.545 100.185,-41.29 122.68,-41.29 X5.25@123.935,-42.545 125.19,-41.29 148.08,-41.29 X6.25@149.335,-42.545 150.61,-41.27 155.975,-41.27 157.225,-40.02 163.035,-40.02 RR6.6@164.29,-41.275
*WR#: RR3.5 U2.40 X1.24 X2.24 X3.24 | length 93.8
  Top Layer w0.25: U2.40@80.05,-63 82.225,-63 84.375,-60.85 v1(92.2,-60.85) ; X1.24@101.075,-45.085 102.33,-43.83 125.22,-43.83 X2.24@126.475,-45.085 127.73,-43.83 150.62,-43.83 X3.24@151.875,-45.085 157.305,-45.085 RR3.5@158.575,-43.815
  Bottom Layer w0.25: v1(92.2,-60.85) 92.2,-57.95 95.3,-54.85 95.3,-48.8 97.725,-46.375 99.4,-46.375 100.69,-45.085 X1.24@101.075,-45.085
+3V3: C12.1 U1.2 U2.2 U3.2 U4.3 | length 92.8
  Top Layer w0.25: U3.2@72.45,-81.25 v1(73.7,-81.25) ; U2.2@72.45,-59.5 v1(73.7,-59.5) ; U1.2@72.45,-27 U1.2@72.692,-27 ; U1.2@72.975,-26.975 72.717,-26.975 U1.2@72.692,-27 ; v1(74.475,-26.6) 73.9,-26.6 73.5,-27 U1.2@72.692,-27
  Top Layer w0.5: v1(68.025,-75.75) v1(72,-75.75) ; v1(70.275,-46.875) v1(72.75,-46.875)
  Top Layer w1: U4.3@76.4,-95.9 C12.1@80.8,-95.9
  Bottom Layer w0.5: v1(68.025,-75.75) 68.025,-65.175 v1(73.7,-59.5) 72.25,-58.05 72.25,-53.325 72.75,-52.825 v1(72.75,-46.875) ; v1(70.275,-46.875) 70.275,-34.4 75.275,-29.4 75.275,-27 74.875,-26.6 v1(74.475,-26.6) ; v1(72,-75.75) 72,-79.55 v1(73.7,-81.25) 73.7,-93.2 U4.3@76.4,-95.9
+5V0: C1.1 C2.1 C3.1 C4.1 C5.2 C6.2 C7.2 C11.1 J1.3 J1.4 J2.3 J2.4 J3.3 J3.4 J4.3 J4.4 R1.1 R2.1 R3.1 R4.2 RR1.1 RR2.1 RR3.1 RR4.1 RR5.1 RR6.1 RR7.1 U4.2 X1.18 X2.18 X3.18 X4.18 X5.18 X6.18 | length 486.7
  Top Layer w0.5: X3.18@151.875,-60.325 152.225,-60.325 RR3.1@158.575,-53.975 RR6.1@164.29,-53.975 ; RR4.1@158.575,-29.845 RR7.1@164.29,-29.845
  Top Layer w1: J1.3@1.27,-95.91 C1.1@7.75,-95.91 C2.1@17.25,-95.91 J2.4@21.27,-95.91 J2.3@23.81,-95.91 C3.1@37.25,-95.91 J3.4@41.27,-95.91 J3.3@43.81,-95.91 C4.1@57.25,-95.91 J4.4@61.27,-95.91 J4.3@63.81,-95.91 ; C11.1@70.99,-95.91 C11.1@71,-95.9
  Top Layer w1.6: C5.2@94.44,-59.055 95.71,-60.325 X1.18@101.075,-60.325 118.57,-60.325 C6.2@119.84,-59.055 121.11,-60.325 X2.18@126.475,-60.325 143.97,-60.325 C7.2@145.24,-59.055 146.51,-60.325 X3.18@151.875,-60.325
  Top Layer w2: v2(85.99,-59.055) C5.2@94.44,-59.055
  Bottom Layer w0.5: 70.175,-76.75 67.4,-76.75 67.1,-76.45 67.1,-64.725 71.17,-60.655 R2.1@71.17,-52 R4.2@71.17,-48.5 71.17,-34.855 76.175,-29.85 76.175,-22.4 73.275,-19.5 R1.1@71.17,-19.5 ; RR1.1@158.575,-102.235 160.425,-100.385 160.425,-79.955 ; RR2.1@158.575,-78.105 160.425,-79.955 ; RR7.1@164.29,-29.845 166.14,-31.695 166.14,-52.125 RR6.1@164.29,-53.975 166.14,-55.825 166.14,-76.255 RR5.1@164.29,-78.105 162.275,-78.105 160.425,-79.955
  Bottom Layer w1.6: C5.2@94.44,-59.055 95.71,-60.325 X1.18@101.075,-60.325 118.57,-60.325 C6.2@119.84,-59.055 121.11,-60.325 X2.18@126.475,-60.325 143.97,-60.325 C7.2@145.24,-59.055 146.51,-60.325 X3.18@151.875,-60.325
  Bottom Layer w2: J1.3@1.27,-95.91 C1.1@7.75,-95.91 C2.1@17.25,-95.91 J2.4@21.27,-95.91 J2.3@23.81,-95.91 C3.1@37.25,-95.91 J3.4@41.27,-95.91 J3.3@43.81,-95.91 C4.1@57.25,-95.91 J4.4@61.27,-95.91 J4.3@63.81,-95.91 70.99,-95.91 C11.1@71,-95.9 ; U4.2@76.4,-98.44 73.54,-98.44 C11.1@71,-95.9 ; v2(85.99,-59.055) 83.82,-61.225 74.275,-61.225 71.17,-64.33 R3.1@71.17,-73.75 70.175,-74.745 70.175,-76.75 70.175,-80.475 71.6,-81.9 71.6,-95.3 C11.1@71,-95.9
A0: J1.5 J2.5 J3.5 J4.5 U3.14 | length 76.9
  Top Layer w0.25: J4.5@63.81,-93.37 64.255,-93.37 70.375,-87.25 U3.14@72.45,-87.25
  Bottom Layer w0.25: J1.5@1.27,-93.37 2.54,-92.1 22.54,-92.1 J2.5@23.81,-93.37 25.08,-92.1 42.54,-92.1 J3.5@43.81,-93.37 45.08,-92.1 62.54,-92.1 J4.5@63.81,-93.37
A1: J1.6 J2.6 J3.6 J4.6 U3.13 | length 74.5
  Top Layer w0.25: J1.6@3.81,-93.37 5.08,-94.64 20,-94.64 J2.6@21.27,-93.37 22.54,-94.64 40,-94.64 J3.6@41.27,-93.37 42.54,-94.64 60,-94.64 J4.6@61.27,-93.37 62.54,-92.1 64.65,-92.1 70,-86.75 U3.13@72.45,-86.75
A2: J1.7 J2.7 J3.7 J4.7 U3.12 | length 76.2
  Top Layer w0.25: J4.7@63.81,-90.83 64.145,-90.83 68.725,-86.25 U3.12@72.45,-86.25
  Bottom Layer w0.25: J1.7@1.27,-90.83 2.54,-89.56 22.54,-89.56 J2.7@23.81,-90.83 25.08,-89.56 42.54,-89.56 J3.7@43.81,-90.83 45.08,-89.56 62.54,-89.56 J4.7@63.81,-90.83
A3: J1.8 J2.8 J3.8 J4.8 U3.11 | length 73.9
  Top Layer w0.25: J1.8@3.81,-90.83 5.08,-92.1 20,-92.1 J2.8@21.27,-90.83 22.54,-92.1 40,-92.1 J3.8@41.27,-90.83 42.54,-92.1 60,-92.1 J4.8@61.27,-90.83 62.55,-89.55 64.525,-89.55 68.325,-85.75 U3.11@72.45,-85.75
A4: J1.9 J2.9 J3.9 J4.9 U3.10 | length 75.6
  Top Layer w0.25: J4.9@63.81,-88.29 64.235,-88.29 67.275,-85.25 U3.10@72.45,-85.25
  Bottom Layer w0.25: J1.9@1.27,-88.29 2.54,-87.02 22.54,-87.02 J2.9@23.81,-88.29 25.08,-87.02 42.54,-87.02 J3.9@43.81,-88.29 45.08,-87.02 62.54,-87.02 J4.9@63.81,-88.29
A5: J1.10 J2.10 J3.10 J4.10 U3.9 | length 73.3
  Top Layer w0.25: J1.10@3.81,-88.29 5.08,-89.56 20,-89.56 J2.10@21.27,-88.29 22.54,-89.56 40,-89.56 J3.10@41.27,-88.29 42.54,-89.56 60,-89.56 J4.10@61.27,-88.29 62.51,-87.05 64.575,-87.05 66.875,-84.75 U3.9@72.45,-84.75
A6: J1.11 J2.11 J3.11 J4.11 U3.8 | length 75
  Top Layer w0.25: J4.11@63.81,-85.75 64.6,-85.75 66.1,-84.25 U3.8@72.45,-84.25
  Bottom Layer w0.25: J1.11@1.27,-85.75 2.54,-84.48 22.54,-84.48 J2.11@23.81,-85.75 25.08,-84.48 42.54,-84.48 J3.11@43.81,-85.75 45.08,-84.48 62.54,-84.48 J4.11@63.81,-85.75
A7: J1.12 J2.12 J3.12 J4.12 U3.7 | length 72.6
  Top Layer w0.25: J1.12@3.81,-85.75 5.08,-87.02 20,-87.02 J2.12@21.27,-85.75 22.54,-87.02 40,-87.02 J3.12@41.27,-85.75 42.54,-87.02 60,-87.02 J4.12@61.27,-85.75 62.545,-84.475 65.025,-84.475 65.75,-83.75 U3.7@72.45,-83.75
A8: J1.13 J2.13 J3.13 J4.13 U3.6 | length 74.4
  Top Layer w0.25: J4.13@63.81,-83.21 63.85,-83.25 U3.6@72.45,-83.25
  Bottom Layer w0.25: J1.13@1.27,-83.21 2.54,-81.94 22.54,-81.94 J2.13@23.81,-83.21 25.08,-81.94 42.54,-81.94 J3.13@43.81,-83.21 45.08,-81.94 62.54,-81.94 J4.13@63.81,-83.21
A9: J1.14 J2.14 J3.14 J4.14 U3.5 | length 72.6
  Top Layer w0.25: J1.14@3.81,-83.21 5.08,-84.48 20,-84.48 J2.14@21.27,-83.21 22.54,-84.48 40,-84.48 J3.14@41.27,-83.21 42.54,-84.48 60,-84.48 J4.14@61.27,-83.21 62.53,-81.95 65.75,-81.95 66.55,-82.75 U3.5@72.45,-82.75
A10: J1.15 J2.15 J3.15 J4.15 U3.4 | length 75
  Top Layer w0.25: J4.15@63.81,-80.67 65.27,-80.67 66.85,-82.25 U3.4@72.45,-82.25
  Bottom Layer w0.25: J1.15@1.27,-80.67 2.54,-79.4 22.54,-79.4 J2.15@23.81,-80.67 25.08,-79.4 42.54,-79.4 J3.15@43.81,-80.67 45.08,-79.4 62.54,-79.4 J4.15@63.81,-80.67